# Altium PCB PCB1.PcbDoc
Units mm, origin at the board's own origin, x right, y up, seen from the top; angles counter-clockwise.
Board outline 41.2 x 58.7 mm, 2 copper layers (Top Layer, Bottom Layer); 35 components, 23 nets, 76 pads, 0 vias.
Unrouted connection lines stored in the file: 50.
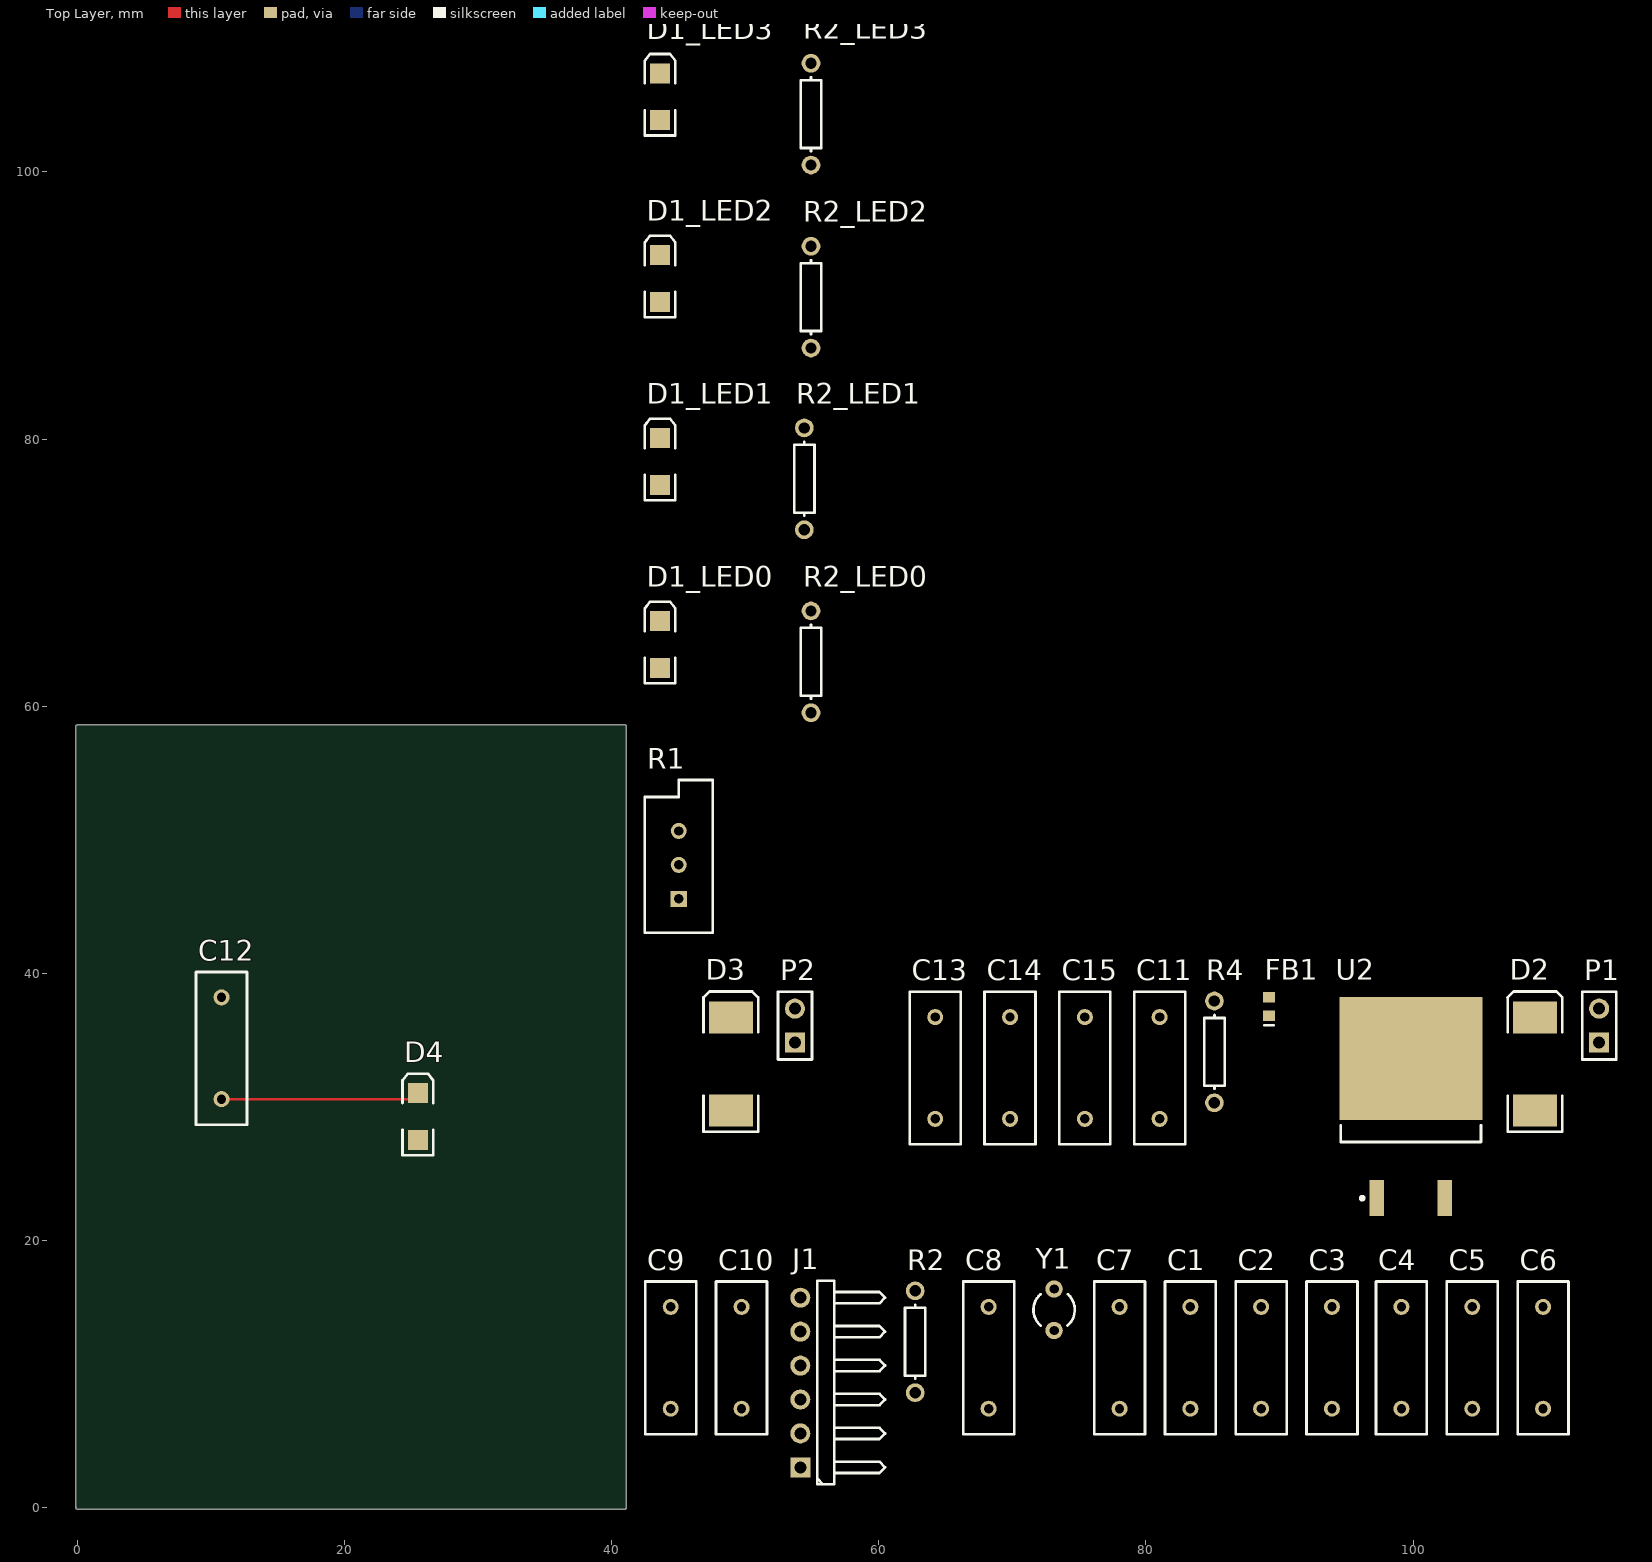
[diagram p0: Top Layer view]
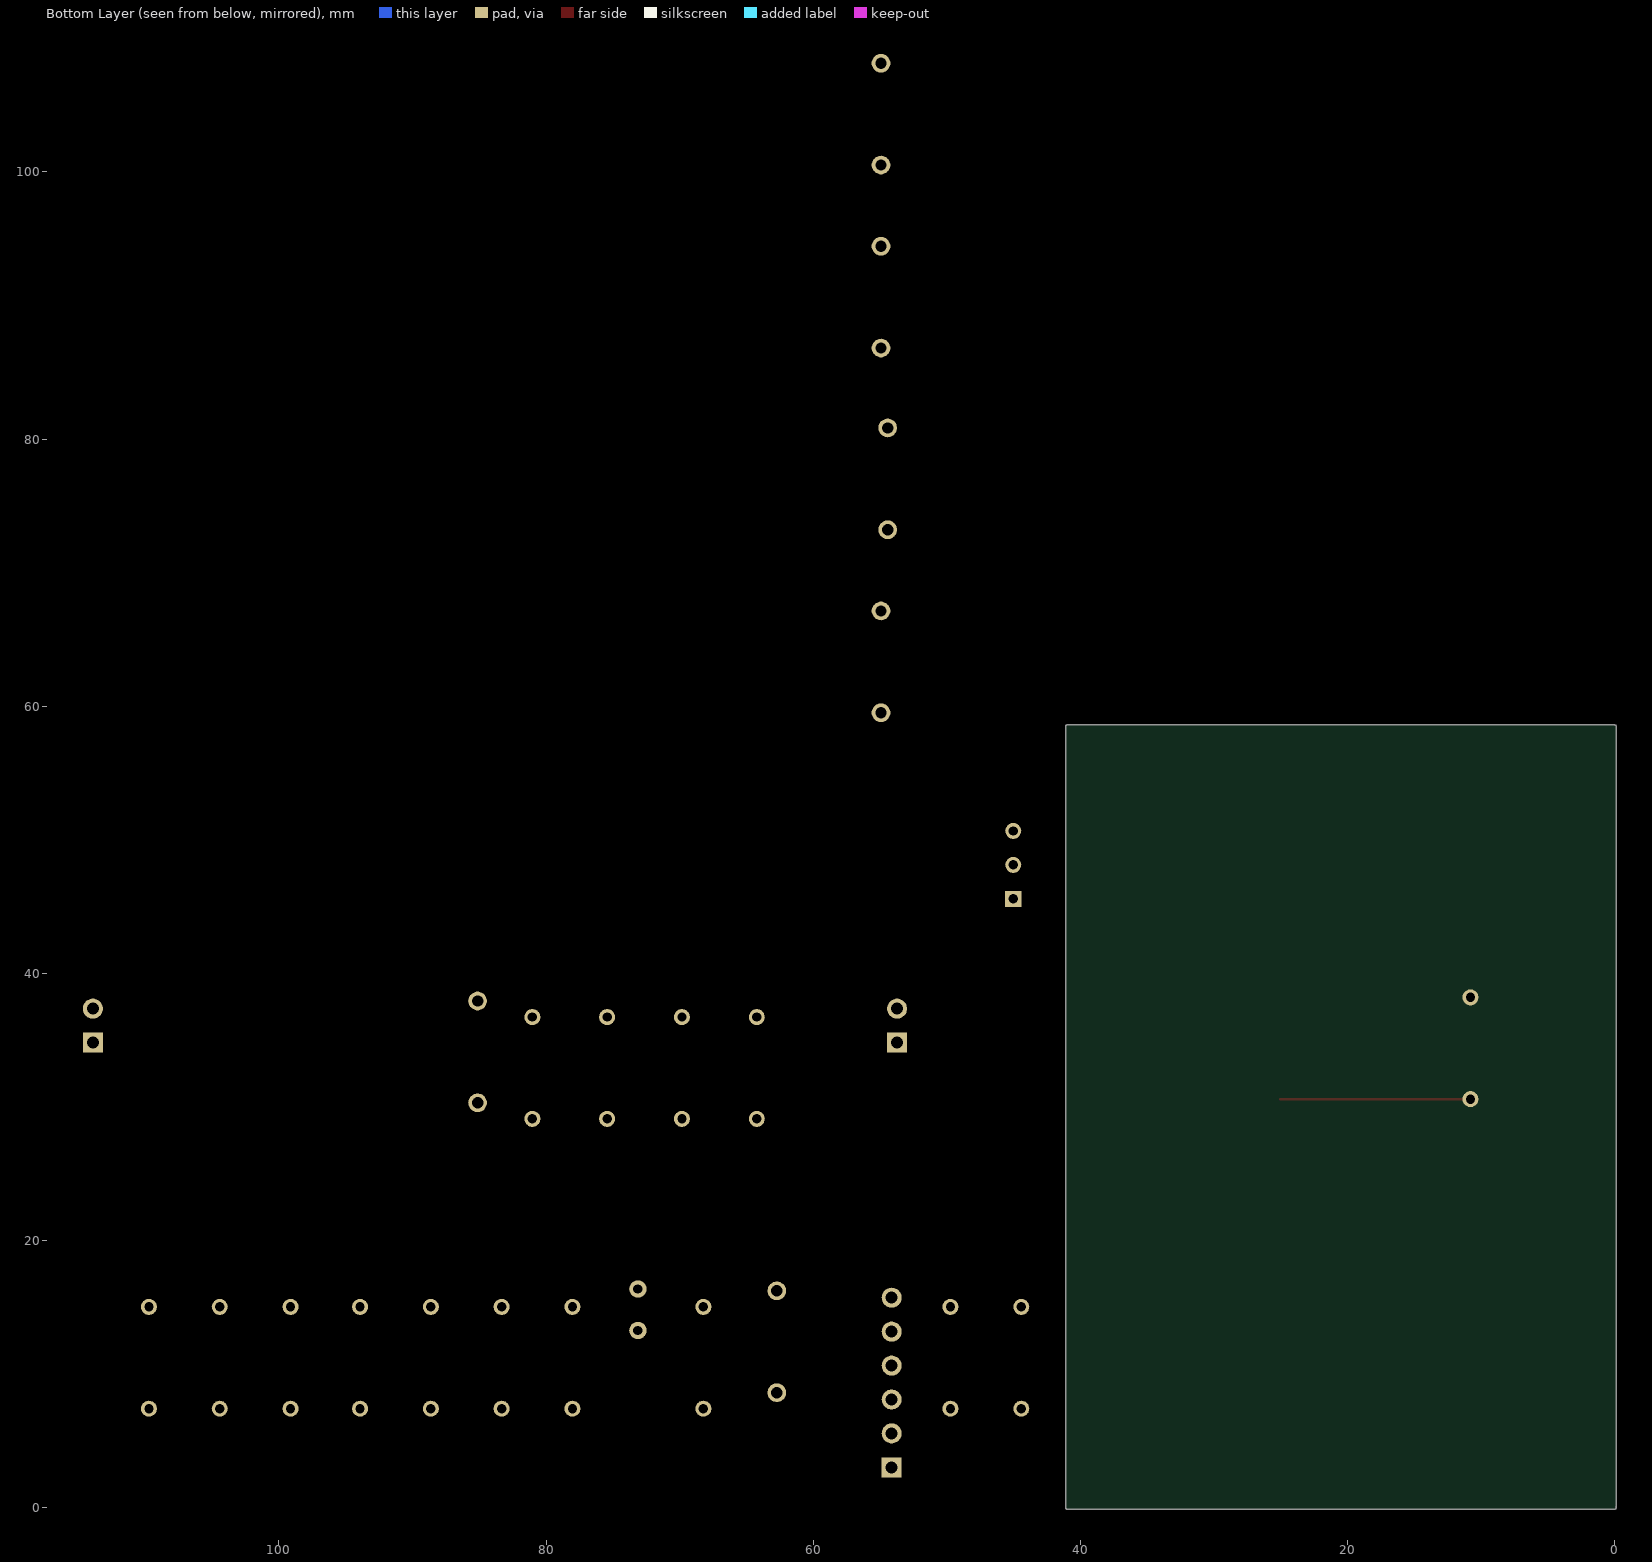
[diagram p1: Bottom Layer view, seen from below]

## Layer stack, top to bottom
Top Solder: solder mask 0.0102, Solder Resist, Dk 3.5
Top Layer: signal copper 0.0356
Dielectric 1: dielectric 0.32, FR-4, Dk 4.8
Bottom Layer: signal copper 0.0356
Bottom Solder: solder mask 0.0102, Solder Resist, Dk 3.5

## Board outline
-0.078,0.064 cw(c0,0.127) -0.1,0.127 -0.1,58.5 cw(c0,58.5) 0,58.6 41,58.6 cw(c41,58.5) 41.1,58.5 41.1,0 cw(c41,0) 41,-0.1 0,-0.1 cw(c0,0)

## Design rules (kind name [scope] priority, off if disabled: settings)
Clearance [All] p1: gap=0.2
HoleSize [All] p1: absolutevalues=TRUE maxlimit=5 minlimit=0.3 maxpercent=80.000 minpercent=20.000
PolygonConnect [All] p1: connectstyle=Relief reliefconductorwidth=0.254 reliefentries=4 polygonreliefangle="90 Angle" airgapwidth=0.254
RoutingVias [All] p1: holewidth=0.3 width=0.7 viastyle="Through Hole" minholewidth=0.3 minwidth=0.7 maxholewidth=1 maxwidth=1.7
SolderMaskExpansion [All] p1: expansion=0.102
UnpouredPolygon [All] p1: allowunpoured=FALSE
Width [All] p1: maxlimit=3 minlimit=0.2 preferedwidth=0.2
28 further rules are at their usual default settings.

## Classes and differential pairs
channel class led: LED0 LED1 LED2 LED3
net class LED[0..3]: LED0 LED1 LED2 LED3
component class TP2: R1
component class POWER: C11 C12 C13 C14 C15 D2 D3 D4 FB1 P1 P2 R4 U2
component class PIC: C1 C2 C3 C4 C5 C6 C7 C8 C9 C10 J1 R2 U1 Y1
component class LED3: D1_LED3 R2_LED3
component class LED2: D1_LED2 R2_LED2
component class LED1: D1_LED1 R2_LED1
component class LED0: D1_LED0 R2_LED0

## Components (designator, comment, footprint, x,y, rotation, side; value= is the part's Value field where it differs from the comment)
C1 "100nF" RAD-0.3 83.328,11.228 r90 top
C2 "100nF" RAD-0.3 88.628,11.228 r90 top
C3 "100nF" RAD-0.3 93.928,11.228 r90 top
C4 "100nF" RAD-0.3 99.128,11.228 r90 top
C5 "100nF" RAD-0.3 104.428,11.228 r90 top
C6 "100nF" RAD-0.3 109.728,11.228 r90 top
C7 "20pF" RAD-0.3 78.028,11.228 r90 top
C8 "20pF" RAD-0.3 68.228,11.228 r90 top
C9 "10uF" RAD-0.3 44.428,11.228 r90 top
C10 "1uF" RAD-0.3 49.728,11.228 r90 top
C11 "10uF" RAD-0.3 81.028,32.928 r90 top
C12 "10uF" RAD-0.3 10.8,34.4 r90 top
C13 "10uF" RAD-0.3 64.228,32.928 r90 top
C14 "1uF" RAD-0.3 69.828,32.928 r90 top
C15 "100nF" RAD-0.3 75.428,32.928 r90 top
D1_LED0 "Green LED" 3.2X1.6X1.1 43.628,64.628 r90 top (schematic designator D1)
D1_LED1 "Green LED" 3.2X1.6X1.1 43.628,78.328 r90 top (schematic designator D1)
D1_LED2 "Green LED" 3.2X1.6X1.1 43.628,92.028 r90 top (schematic designator D1)
D1_LED3 "Green LED" 3.2X1.6X1.1 43.628,105.628 r90 top (schematic designator D1)
D2 "GF1A" SMC 109.128,33.228 r90 top
D3 "GF1A" SMC 48.928,33.228 r90 top
D4 "Green LED" 3.2X1.6X1.1 25.5,29.3 r90 top
FB1 "600r" INDC1608L 89.228,37.528 r90 top
J1 "Program / Debug" HDR1X6H 54.128,3.028 r90 top
P1 "12V Main" HDR1X2 113.928,34.828 r90 top
P2 "12V Battery" HDR1X2 53.728,34.828 r90 top
R1 "10k" VR5 45.028,48.128 r90 top
R2 "4.7k" AXIAL-0.3 62.728,12.428 r90 top
R2_LED0 "330r" AXIAL-0.3 54.928,63.328 r90 top (schematic designator R2)
R2_LED1 "330r" AXIAL-0.3 54.428,77.028 r90 top (schematic designator R2)
R2_LED2 "330r" AXIAL-0.3 54.928,90.628 r90 top (schematic designator R2)
R2_LED3 "330r" AXIAL-0.3 54.928,104.328 r90 top (schematic designator R2)
R4 "470r" AXIAL-0.3 85.128,34.128 r90 top
U2 "AP1117" D2PAK_M 99.828,30.028 r90 top
Y1 "8MHz" R38 73.128,14.828 r0 top

## Footprints (in the part's own frame and the unit in brackets; to place one, negate y for a bottom-side part, rotate by r counter-clockwise, add the part's x,y. Pads: shape width x height; smd on the part's side, far side on the other; paste and mask are expansions set on the pad)
3.2X1.6X1.1 [mm] "SMT LED; 2 Flat Leads"
  rect 1.5x1.5 smd: 1(-1.75,0) 2(1.75,0)
  silkscreen extent -2.9,-1.15 3.2,1.15
AXIAL-0.3 [mm] "Axial Device, Thru-Hole; 2 Leads; 0.3 in Pin Spacing"
  round 1.4 hole 0.85: 1(-3.81,0) 2(3.81,0)
  silkscreen extent -2.77,-0.76 2.77,0.76
D2PAK_M [mm] "D2-PAK, 4-Leads, Body 8.8x10.4mm, Pitch 2.54mm, Lead Span 15.1mm, IPC Low Density"
  rect 2.7x1.1 smd: 1(-6.85,2.54) 3(-6.85,-2.54)
  rect 9.2x10.7 smd: 2(3.6,0)
  silkscreen extent -6.97,-5.25 -1.4,5.25, body extent -2.65,-5.28 6.35,5.28, height 4.69
HDR1X2 [mm] "Connector; Header; 2 Position"
  rect 1.5x1.5 hole 0.9: 1(0,0)
  round 1.5 hole 0.9: 2(2.54,0)
  silkscreen extent -1.27,-1.27 3.81,1.27
HDR1X6H [mm] "Connector; Header; 6 Position; Right Angle"
  rect 1.5x1.5 hole 0.9: 1(0,0)
  round 1.5 hole 0.9: 2(2.54,0) 3(5.08,0) 4(7.62,0) 5(10.16,0) 6(12.7,0)
  silkscreen extent -1.27,-6.35 13.97,-1.27
INDC1608L [mm] "Chip Inductor, Body 1.6x0.8mm, IPC High Density"
  rect 0.8x0.9 smd: 1(-0.7,0) 2(0.7,0)
  silkscreen extent -1.4,-0.35 -1.4,0.35, body extent -0.87,-0.48 0.87,0.48, height 0.55
R38 [mm] "Crystal, Thru-Hole; 2 Leads; Body 3.1 x 8.2 mm (Dia.xH)"
  round 1.3 hole 0.7: 1(0,1.55) 2(0,-1.55)
  silkscreen extent -1.55,-1.19 1.55,1.17
RAD-0.3 [mm] "Radial Cap, Thru-Hole; 2 Leads; 0.3 in Pin Spacing"
  round 1.2 hole 0.7: 1(-3.81,0) 2(3.81,0)
  silkscreen extent -5.71,-1.91 5.71,1.91
SMC [mm] "DO-214-AB/SMC; 2 C-Bend Leads; Body 7.9 x 5.9 mm, inc. leads (LxW)"
  rect 2.4x3.3 smd: 1(-3.475,0) 2(3.475,0)
  silkscreen extent -5.07,-2.05 5.43,2.05
VR5 [mm] "Thru-Hole; 3 Leads"
  rect 1.2x1.2 hole 0.7: 1(-2.54,0)
  round 1.2 hole 0.7: 2(0,0) 3(2.54,0)
  silkscreen extent -5.08,-2.54 6.35,2.54

## Part data
C1 C2 C3 C4 C5 C6 C7 C8 C9 C10 C11 C12 C13 C14 C15: library part Cap, "Capacitor"
D1_LED0 D1_LED1 D1_LED2 D1_LED3 D4: library part LED2, "Typical RED, GREEN, YELLOW, AMBER GaAs LED"
D2 D3: library part Diode, "Default Diode"
FB1: library part Inductor, "Inductor"
P1 P2: library part "Header 2", "Header, 2-Pin"
R1: library part RPot, "Potentiometer"
R2 R2_LED0 R2_LED1 R2_LED2 R2_LED3 R4: library part Res1, "Resistor"
Y1: library part XTAL, "Crystal Oscillator"

## Nets (pads, with @x,y where several pads share a name; then routed paths per layer and width w, separated by ;. In a path a pad name is that pad's centre, name@x,y a point inside that pad or via, vN(x,y) a via of type N, cw(c..) or ccw(c..) an arc to the next point about the centre after c; other vN are vias at no path point)
ALIM: D2.1 P1.1
BATTERY: D3.1 P2.1
GND: C1.1 C2.1 C3.1 C4.1 C5.1 C6.1 C7.1 C8.1 C9.1 C10.1 C11.1 C12.1 C13.1 C14.1 C15.1 D4.2 J1.3 P1.2 P2.2 R1.1 U2.1 | length 14.2
  Top Layer w0.2: C12.1 D4.2@25.04,30.59
LED0: R2_LED0.1
LED1: R2_LED1.1
LED2: R2_LED2.1
LED3: R2_LED3.1
MCLR: J1.1 R2.2
NetC9_2: C9.2 C10.2
NetD1_LED0_1: D1_LED0.1 R2_LED0.2
NetD1_LED1_1: D1_LED1.1 R2_LED1.2
NetD1_LED2_1: D1_LED2.1 R2_LED2.2
NetD1_LED3_1: D1_LED3.1 R2_LED3.2
NetD4_1: D4.1 R4.1
NetR1_3: R1.3
PGC: J1.5
PGD: J1.4
V3P3: C1.2 C2.2 C3.2 C4.2 C5.2 C13.2 C14.2 FB1.1 J1.2 R2.1
V3P3A: C6.2 C15.2 FB1.2 R1.2
V5: C11.2 C12.2 D2.2 D3.2 R4.2 U2.3
VCC: D1_LED0.2 D1_LED1.2 D1_LED2.2 D1_LED3.2
X1: C7.2 Y1.2
X2: C8.2 Y1.1
pads on no net: J1.6 U2.2

## Silkscreen, mask and mechanical layers (free items; w line width, h text height)
Board Outline:
  lines w0.2: 0,0 41,0 41,58.5 0,58.5 0,0.127